# Altium PCB Breakout_18pin.PcbDoc
Units mm, origin at the board's own origin, x right, y up, seen from the top; angles counter-clockwise.
Board outline 55 x 25 mm, 2 copper layers (Top Layer, Bottom Layer), stack 1.571 mm thick; 7 components, 18 nets, 62 pads, 0 vias.
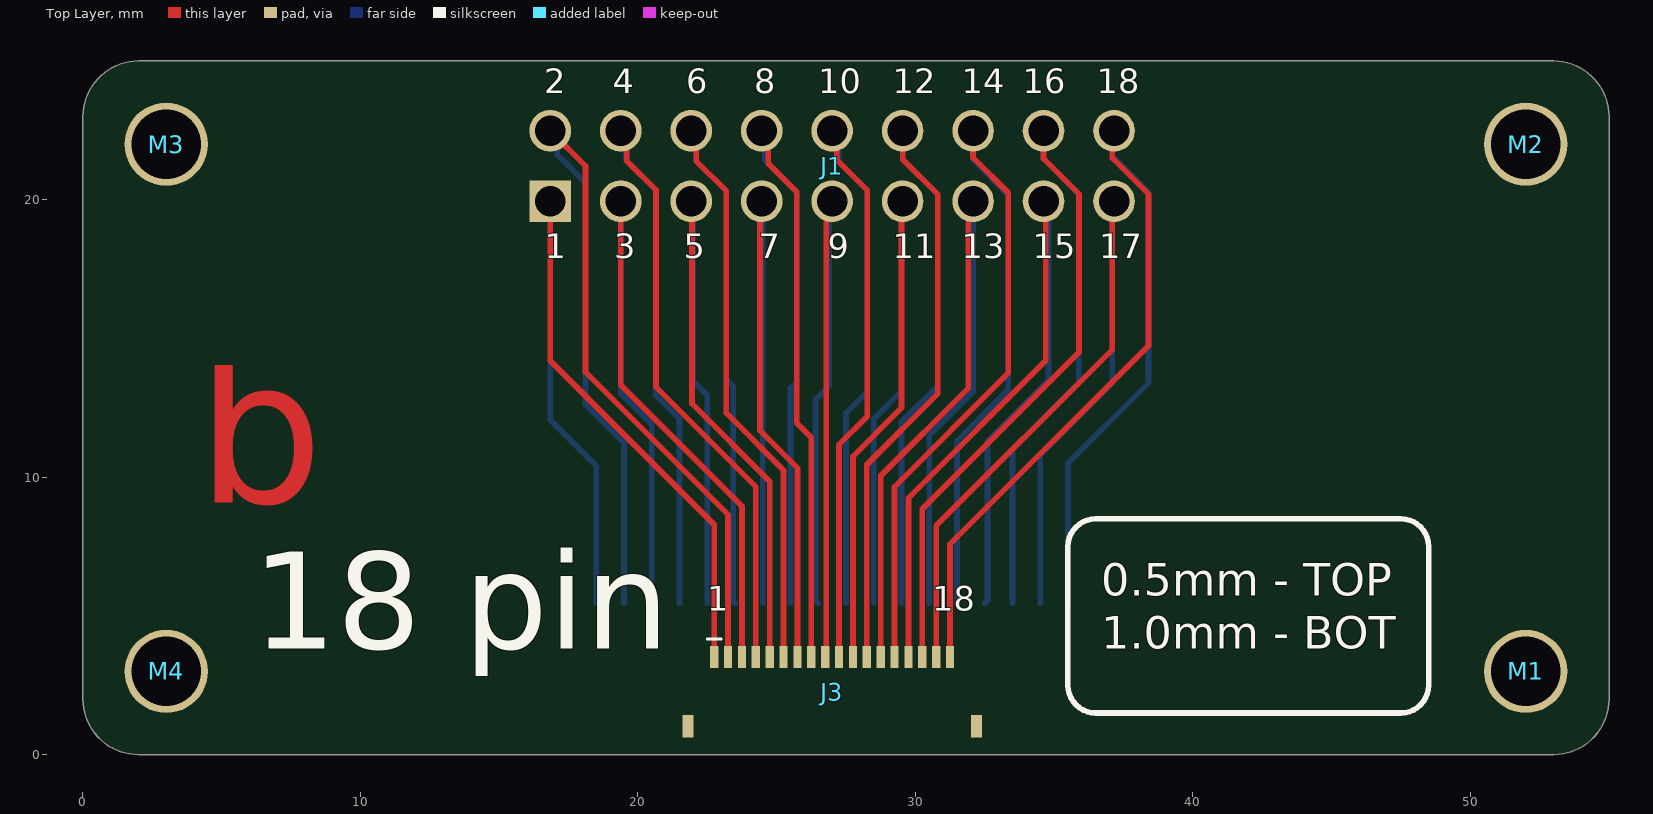
[diagram p0: Top Layer view]
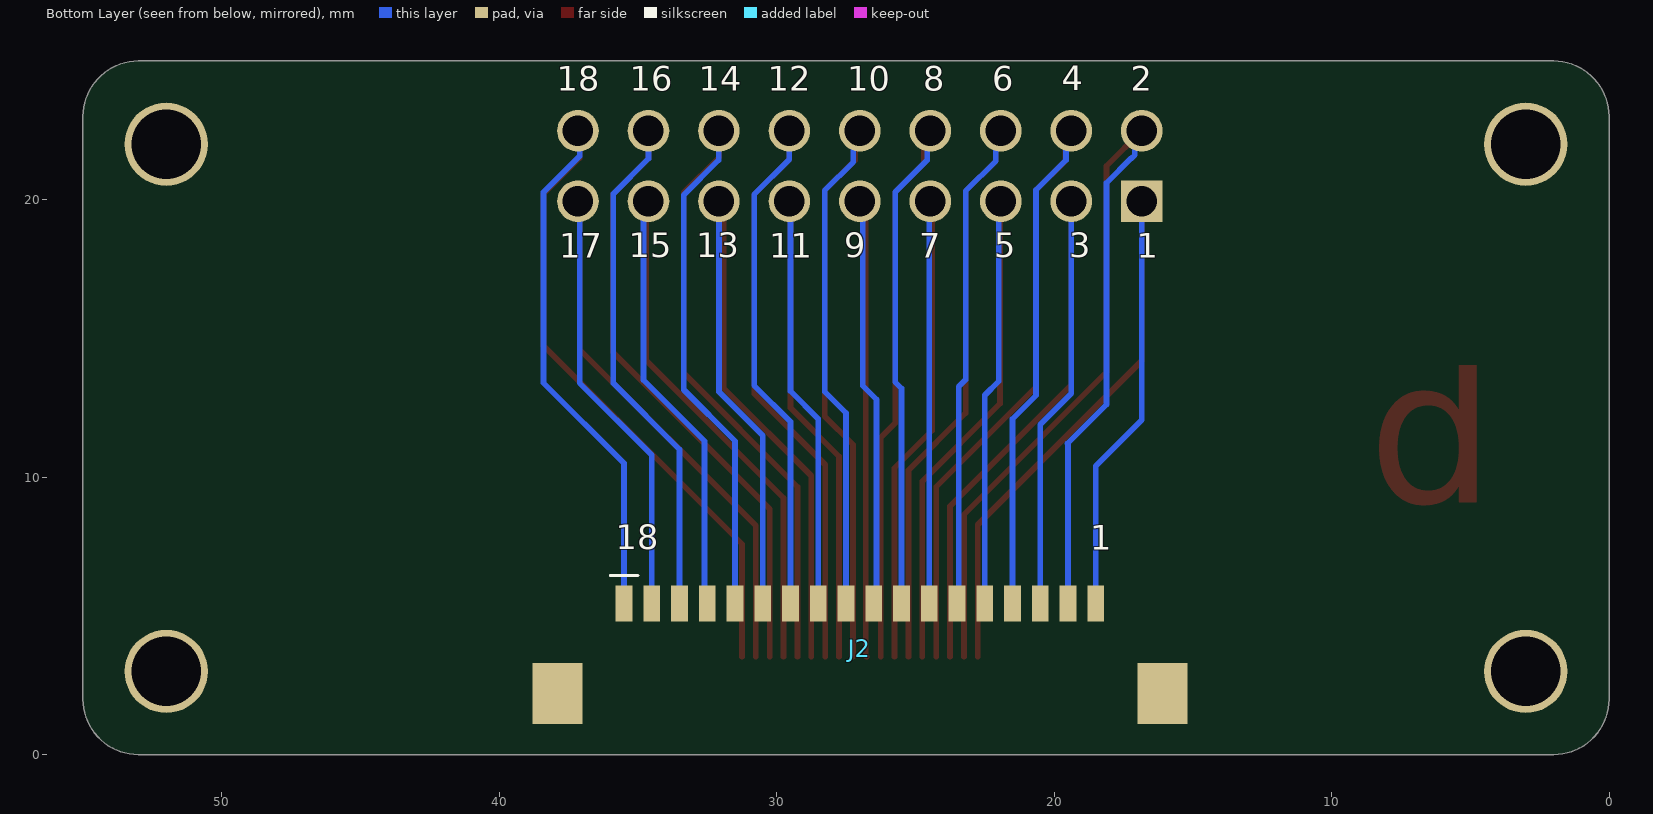
[diagram p1: Bottom Layer view, seen from below]

## Layer stack, top to bottom
Top Solder: solder mask 0.0102, Solder Resist, Dk 3.5
Top Layer: signal copper 0.0356
Dielectric 1: dielectric 1.5, FR-4, Dk 4.8
Bottom Layer: signal copper 0.0356
Bottom Solder: solder mask 0.0102, Solder Resist, Dk 3.5

## Board outline
2,0 cw(c2,2) 0,2 0,23 cw(c2,23) 2,25 53,25 cw(c53,23) 55,23 55,2 cw(c53,2) 53,0

## Design rules (kind name [scope] priority, off if disabled: settings)
Clearance [All] p1: gap=0.204 ignorepadtopadclearanceinfootprint=TRUE
DiffPairsRouting [All] p1: maxlimit=0.254 minlimit=0.064 mostfreqgap=0.127 toplayer_minwidth=0.178 toplayer_maxwidth=0.457 toplayer_prefwidth=0.457 bottomlayer_minwidth=0.178 bottomlayer_maxwidth=0.457 bottomlayer_prefwidth=0.457 impedanceprofiledriven=TRUE maxuncoupledlength=12.7
HoleSize [All] p1: absolutevalues=TRUE maxlimit=5 minlimit=0.153 maxpercent=80.000 minpercent=20.000
MinimumSolderMaskSliver [All] p1: minsoldermaskwidth=0.178
PolygonConnect [All] p1: connectstyle=Relief reliefconductorwidth=0.254 reliefentries=4 polygonreliefangle="90 Angle" airgapwidth=0.254
RoutingVias [All] p1: holewidth=0.305 width=0.61 viastyle="Through Hole" minholewidth=0.254 minwidth=0.508 maxholewidth=0.5 maxwidth=1.27
SolderMaskExpansion [All] p1: expansion=0.102 istentingtop=FALSE
Width [All] p1: maxlimit=25.4 minlimit=0.204 preferedwidth=0.254 minimp=50.000000 maximp=50.000000 favimp=50.000000
27 further rules are at their usual default settings.

## Classes and differential pairs
component class Main: J2 J3 M1 M2 M3 M4

## Components (designator, comment, footprint, x,y, rotation, side; value= is the part's Value field where it differs from the comment)
J1 "68602-118HLF" HDR-V-2X9-2.54MM 27,21.214 r0 top
J2 "XF3M(1)-1815-1B" CONN-FFC-H-18P-1MM 27,3.829 r180 bottom
J3 "FFC2B28-18-G" CONN-FFC-H-18P-0.5MM 27,2.272 r0 top
M1 "MTG_HOLE" MH_P_2.5MM 52,3 r90 top
M2 "MTG_HOLE" MH_P_2.5MM 52,22 r90 top
M3 "MTG_HOLE" MH_P_2.5MM 3,22 r90 top
M4 "MTG_HOLE" MH_P_2.5MM 3,3 r90 top

## Footprints (in the part's own frame and the unit in brackets; to place one, negate y for a bottom-side part, rotate by r counter-clockwise, add the part's x,y. Pads: shape width x height; smd on the part's side, far side on the other; paste and mask are expansions set on the pad)
CONN-FFC-H-18P-0.5MM [mm]
  rect 0.3x0.8 smd: 1(-4.25,1.25) 2(-3.75,1.25) 3(-3.25,1.25) 4(-2.75,1.25) 5(-2.25,1.25) 6(-1.75,1.25) 7(-1.25,1.25) 8(-0.75,1.25) 9(-0.25,1.25) 10(0.25,1.25) 11(0.75,1.25) 12(1.25,1.25) 13(1.75,1.25) 14(2.25,1.25) 15(2.75,1.25) 16(3.25,1.25) 17(3.75,1.25) 18(4.25,1.25)
  rect 0.4x0.8 smd: ME1(-5.2,-1.25) ME2(5.2,-1.25)
  silkscreen extent -4.5,1.9 -4,1.9, body extent -5.5,-1.8 5.5,1.45, height 1.72
CONN-FFC-H-18P-1MM [mm]
  rect 0.6x1.3 smd: 1(-8.5,1.625) 2(-7.5,1.625) 3(-6.5,1.625) 4(-5.5,1.625) 5(-4.5,1.625) 6(-3.5,1.625) 7(-2.5,1.625) 8(-1.5,1.625) 9(-0.5,1.625) 10(0.5,1.625) 11(1.5,1.625) 12(2.5,1.625) 13(3.5,1.625) 14(4.5,1.625) 15(5.5,1.625) 16(6.5,1.625) 17(7.5,1.625) 18(8.5,1.625)
  rect 1.8x2.2 smd: ME1(-10.9,-1.625) ME2(10.9,-1.625)
  silkscreen extent -9,2.63 -8,2.63, body extent -11.3,-3.68 11.3,2.73, height 2
HDR-V-2X9-2.54MM [mm]
  rect 1.5x1.5 hole 1.1: 1(-10.16,-1.27)
  round 1.5 hole 1.1: 2(-10.16,1.27) 3(-7.62,-1.27) 4(-7.62,1.27) 5(-5.08,-1.27) 6(-5.08,1.27) 7(-2.54,-1.27) 8(-2.54,1.27) 9(0,-1.27) 10(0,1.27) 11(2.54,-1.27) 12(2.54,1.27) 13(5.08,-1.27) 14(5.08,1.27) 15(7.62,-1.27) 16(7.62,1.27) 17(10.16,-1.27) 18(10.16,1.27)
  body extent -11.43,-2.41 11.43,2.41, height 8.38
MH_P_2.5MM [mm]
  round 3 hole 2.5: 1(0,0)

## Part data
J1: library part HDR-V-2X9-M-2.54MM, "Conn Unshrouded Header HDR 18 POS 2.54mm Solder ST Top Entry Thru-Hole BergStik® Bulk", Color=Black, Current Rating=3A, Flammability Rating="UL94 V-0", Insulation Resistance=5GR, Manufacturer 1="Amphenol ICC / FCI", Max Operating Temperature=125°C, Max Voltage Rating (AC)=1.5kV, Min Operating Temperature=-65°C, Package Quantity=400, Category=Connectors, ComponentLink1Description=https://datasheet.ciiva.com/5168/67996-5168806.pdf?src-supplier=Mouser, ComponentLink1URL=https://datasheet.ciiva.com/5168/67996-5168806.pdf?src-supplier=Mouser, ComponentLink2Description=https://datasheet.ciiva.com/10135/67996-10135126.pdf?src-supplier=Avnet, ComponentLink2URL=https://datasheet.ciiva.com/10135/67996-10135126.pdf?src-supplier=Avnet, Contact Gender=Male, Contact Material=Bronze, Contact Mating Length=0.23inch, Contact Plating=Gold,GXT, Contact Post Length=3.81mm, Contact Type="Male Pin", Depth=4.83mm, Gender=Male, Housing Color=Black, Housing Material=Thermoplastic, Length=22.86mm, Manufacturer Part Number 1=68602-118HLF, Mounting Technology="Through Hole", Number of Contacts=18, Number of Positions=18, Number of Rows=2, Orientation=Straight, Packaging=Bulk, Pitch=2.54mm, Pricing="1=0.1296 (USD)", Radiation Hardening=No, RoHS=Yes, Row Spacing=0.1inch, Series="BERGSTIK® II, MezzSelect™, Basics+", Stock=380, Supplier="Arrow Electronics", Supplier Part Number=68602-118HLF, Termination=Solder, Voltage Rating=1.5kV
J2: library part CONN-FFC-H-18P-1MM, "FFC & FPC Connectors RotaryBackLock 1.0mm Dual Contact 18pin", Actuator Color=Black, Contact Resistance=50mR, Current Rating=500mA, Flammability Rating="UL94 V-0", Housing Color=Natural, Insulation Resistance=100MR, Manufacturer 1=Omron, Max Operating Temperature=85°C, Max Voltage Rating (DC)=5.05kV, Min Operating Temperature=-30°C, Package Quantity=1500, Supplier Part Number=40AJ2874, Voltage Rating=50V, Actuator Material="Polymer,Liquid Crystal Polymer", Category="FFC / FPC", ComponentLink1Description=https://datasheet.ciiva.com/29758/xf3m-0813-29758486.pdf?src-supplier=Digi-Key, ComponentLink1URL=https://datasheet.ciiva.com/29758/xf3m-0813-29758486.pdf?src-supplier=Digi-Key, ComponentLink2Description=https://datasheet.ciiva.com/29758/xf3m-0813-29758490.pdf?src-supplier=Digi-Key, ComponentLink2URL=https://datasheet.ciiva.com/29758/xf3m-0813-29758490.pdf?src-supplier=Digi-Key, Contact Location=Dual, Contact Material="Copper Alloy", Contact Plating=Gold, Housing Material=Polymer, Manufacturer Part Number 1=XF3M(1)-1815-1B, Mating Cycles=20, Max Current Rating=500mA, Mounting Technology="Surface Mount", Number of Contacts=18, Number of Positions=18, Number of Rows=1, Orientation="Right Angle", Packaging="Tape and Reel", Pitch=1mm, Pricing="1500=1.15 (USD)", RoHS=Yes, RoHS Compliant=Yes, Series=XF3M, Stock=740, Supplier=Newark, Termination=Solder
J3: library part CONN-FFC-H-18P-0.5MM, "18W, 0.5MM Ffc Con, R/a, Dual Cont,", Manufacturer 1="Global Connector Technology", Supplier Part Number=49AJ2853, Category=Connectors, Manufacturer Part Number 1=FFC2B28-18-G, Pricing="1=0.207, 10=0.207, 25=0.207, 50=0.207, 100=0.207, 250=0.207, 500=0.207 (USD)", RoHS=No, Stock=3153, Supplier=Newark
M1 M2 M3 M4: "MTG HOLE PLATED VARIOUS SIZES"

## Nets (pads, with @x,y where several pads share a name; then routed paths per layer and width w, separated by ;. In a path a pad name is that pad's centre, name@x,y a point inside that pad or via, vN(x,y) a via of type N, cw(c..) or ccw(c..) an arc to the next point about the centre after c; other vN are vias at no path point)
1: J1.1 J2.18 J3.1 | length 34
  Top Layer w0.204: J1.1 16.84,14.194 22.75,8.284 J3.1
  Bottom Layer w0.204: J1.1 16.84,12.06 18.5,10.4 J2.18
2: J1.2 J2.17 J3.2 | length 39.8
  Top Layer w0.204: J1.2 18.11,21.214 18.11,13.79 23.25,8.65 J3.2
  Bottom Layer w0.204: J1.2 17.088,22.236 17.088,21.612 17.2,21.5 17.217,21.5 18.11,20.607 18.11,12.621 19.515,11.215 19.5,11.2 J2.17
3: J1.3 J2.16 J3.3 | length 33.2
  Top Layer w0.204: J1.3 19.38,13.32 23.75,8.95 J3.3
  Bottom Layer w0.204: J1.3 19.38,13.02 20.5,11.9 J2.16
4: J1.4 J2.15 J3.4 | length 38.9
  Top Layer w0.204: J1.4 19.6,22.264 19.6,21.4 20.65,20.35 20.65,13.25 24.25,9.65 J3.4
  Bottom Layer w0.204: J1.4 19.572,22.292 19.572,21.428 20.65,20.35 20.65,12.95 21.5,12.1 J2.15
5: J1.5 J2.14 J3.5 | length 32.3
  Top Layer w0.204: J1.5@21.95,19.944 21.95,12.65 24.75,9.85 J3.5
  Bottom Layer w0.204: J1.5@22,19.944 22,13.452 22.5,12.952 J2.14
6: J1.6 J2.13 J3.6 | length 38
  Top Layer w0.204: J1.6 22.1,22.304 22.1,21.4 23.19,20.31 23.19,12.31 25.25,10.25 J3.6
  Bottom Layer w0.204: J1.6 22.1,22.304 22.1,21.4 23.19,20.31 23.19,13.51 23.438,13.262 23.438,5.516 J2.13
7: J1.7 J2.12 J3.7 | length 31.7
  Top Layer w0.204: J1.7@24.4,19.944 24.4,11.677 25.75,10.327 J3.7
  Bottom Layer w0.204: J2.12 J1.7@24.5,20.127
8: J1.8 J2.11 J3.8 | length 37.4
  Top Layer w0.204: J1.8 24.7,22.244 24.7,21.3 25.73,20.27 25.73,11.945 26.25,11.425 J3.8
  Bottom Layer w0.204: J1.8 24.572,22.372 24.572,21.428 25.73,20.27 25.73,13.43 25.5,13.2 J2.11
9: J1.9 J2.10 J3.9 | length 31.2
  Top Layer w0.204: J3.9 26.786,3.558 J1.9@26.786,19.944
  Bottom Layer w0.204: J2.10 26.4,5.554 26.4,12.8 26.9,13.3 J1.9@26.9,19.944
10: J1.10 J2.9 J3.10 | length 37.8
  Top Layer w0.204: J1.10 27.172,22.312 27.172,21.428 28.27,20.33 28.27,12.195 27.25,11.175 J3.10
  Bottom Layer w0.204: J1.10 27.235,22.249 27.235,21.365 28.27,20.33 28.27,13.084 27.5,12.314 J2.9
11: J1.11 J2.8 J3.11 | length 32.5
  Top Layer w0.204: J3.11 27.75,10.75 29.5,12.5 J1.11@29.5,19.944
  Bottom Layer w0.204: J2.8 28.5,12.1 29.5,13.1 J1.11@29.5,20.37
12: J1.12 J2.7 J3.12 | length 38.6
  Top Layer w0.204: J3.12 28.25,10.45 30.81,13.01 30.81,20.19 29.54,21.46 J1.12
  Bottom Layer w0.204: J2.7 29.5,12 30.81,13.31 30.81,20.19 29.54,21.46 J1.12
13: J1.13 J2.6 J3.13 | length 33.2
  Top Layer w0.204: J3.13 28.75,10.05 31.9,13.2 J1.13@31.9,20
  Bottom Layer w0.204: J2.6 30.5,11.5 32.08,13.08 J1.13@32.08,20.22
14: J1.14 J2.5 J3.14 | length 39.5
  Top Layer w0.204: J3.14 29.25,9.65 33.35,13.75 33.35,20.25 32.08,21.52 J1.14
  Bottom Layer w0.204: J2.5 31.5,11.3 33.35,13.15 33.35,20.167 32.089,21.428 32.089,22.475 J1.14
15: J1.15 J2.4 J3.15 | length 34.3
  Top Layer w0.204: J3.15 29.75,9.25 34.7,14.2 J1.15@34.7,20.1
  Bottom Layer w0.204: J2.4 32.6,5.554 32.6,11.3 34.8,13.5 J1.15@34.8,20.15
16: J1.16 J2.3 J3.16 | length 40.4
  Top Layer w0.204: J3.16 30.25,8.85 35.9,14.5 35.9,20.2 34.62,21.48 J1.16
  Bottom Layer w0.204: J2.3 33.5,11 35.89,13.39 35.89,20.21 34.62,21.48 J1.16
17: J1.17 J2.2 J3.17 | length 35.1
  Top Layer w0.204: J3.17 30.75,8.25 37.1,14.6 J1.17@37.1,19.944
  Bottom Layer w0.204: J2.2 34.5,10.8 37.1,13.4 J1.17@37.1,20.4
18: J1.18 J2.1 J3.18 | length 41.3
  Top Layer w0.204: J3.18 31.25,7.587 38.4,14.737 38.4,20.2 37.1,21.5 37.1,22.424 J1.18
  Bottom Layer w0.204: J2.1 35.5,10.5 38.4,13.4 38.4,20.268 37.1,21.568 37.1,22.424 J1.18
pads on no net: J2.ME1 J2.ME2 J3.ME1 J3.ME2 M1.1 M2.1 M3.1 M4.1

## Other copper
Top Layer:
  text "b" at 4.1,6.8 h12

## Silkscreen, mask and mechanical layers (free items; w line width, h text height)
Top Overlay:
  lines w0.2: 35.5,2.5 ccw(c36.5,2.5) 36.5,1.5 47.5,1.5 ccw(c47.5,2.5) 48.5,2.5 48.5,7.5 ccw(c47.5,7.5) 47.5,8.5 36.5,8.5 ccw(c36.5,7.5) 35.5,7.5 35.5,2.5 ; 35.5,2.5 35.5,2.5
  text "2" at 16.617,23.546 h1.5
  text "4" at 19.097,23.55 h1.5
  text "6" at 21.734,23.545 h1.5
  text "8" at 24.192,23.545 h1.5
  text "10" at 26.492,23.545 h1.5
  text "12" at 29.178,23.546 h1.5
  text "14" at 31.678,23.546 h1.5
  text "16" at 33.878,23.545 h1.5
  text "18" at 36.528,23.545 h1.5
  text "1" at 16.65,17.593 h1.5
  text "3" at 19.15,17.609 h1.5
  text "5" at 21.65,17.609 h1.5
  text "7" at 24.35,17.593 h1.5
  text "9" at 26.85,17.609 h1.5
  text "11" at 29.178,17.593 h1.5
  text "13" at 31.678,17.609 h1.5
  text "15" at 34.228,17.609 h1.5
  text "17" at 36.628,17.593 h1.5
  text "0.5mm - TOP" at 36.7,5.338 h2
  text "1" at 22.5,4.9 h1.5
  text "18" at 30.6,4.899 h1.5
  text "1.0mm - BOT" at 36.7,3.421 h2
  text "18 pin" at 6.1,2.668 h6
  text "c" at 3.169,-11.943 h50
Bottom Overlay:
  text "2" at 17.237,23.646 h1.5
  text "4" at 19.719,23.65 h1.5
  text "6" at 22.232,23.645 h1.5
  text "8" at 24.714,23.645 h1.5
  text "10" at 27.454,23.645 h1.5
  text "12" at 30.323,23.646 h1.5
  text "14" at 32.8,23.646 h1.5
  text "16" at 35.3,23.645 h1.5
  text "18" at 37.928,23.645 h1.5
  text "3" at 19.449,17.645 h1.5
  text "5" at 22.153,17.645 h1.5
  text "9" at 27.563,17.645 h1.5
  text "13" at 32.89,17.645 h1.5
  text "15" at 35.328,17.645 h1.5
  text "1" at 17.02,17.629 h1.5
  text "7" at 24.866,17.629 h1.5
  text "11" at 30.27,17.629 h1.5
  text "17" at 37.828,17.629 h1.5
  text "1" at 18.7,7.1 h1.5
  text "18" at 35.8,7.116 h1.5
Board Outline:
  lines w0.1: 27,25 27.5,25 ; 0,2 ccw(c2,2) 2,0 53,0 ccw(c53,2) 55,2 55,23 ccw(c53,23) 53,25 2,25 ccw(c2,23) 0,23 0,2